# EAGLE board Counter With Two 7 Segment Display PCB (EAGLE 9.7.0)
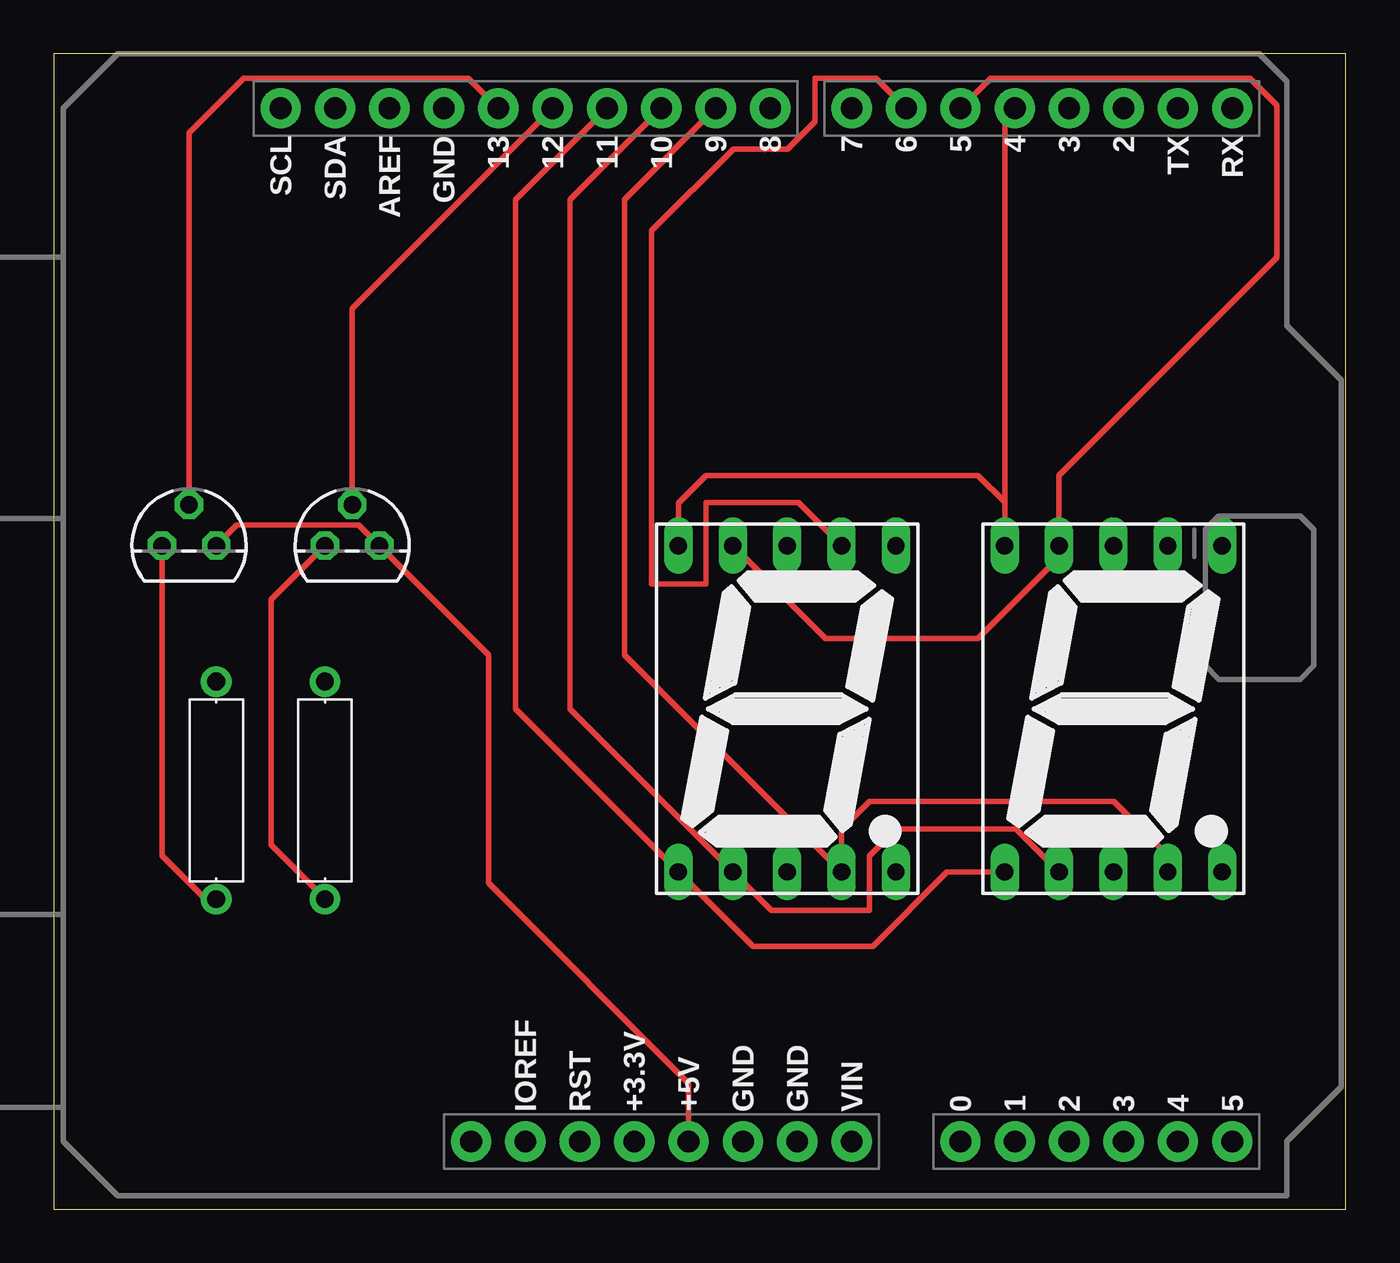
[diagram p0: board, top side]
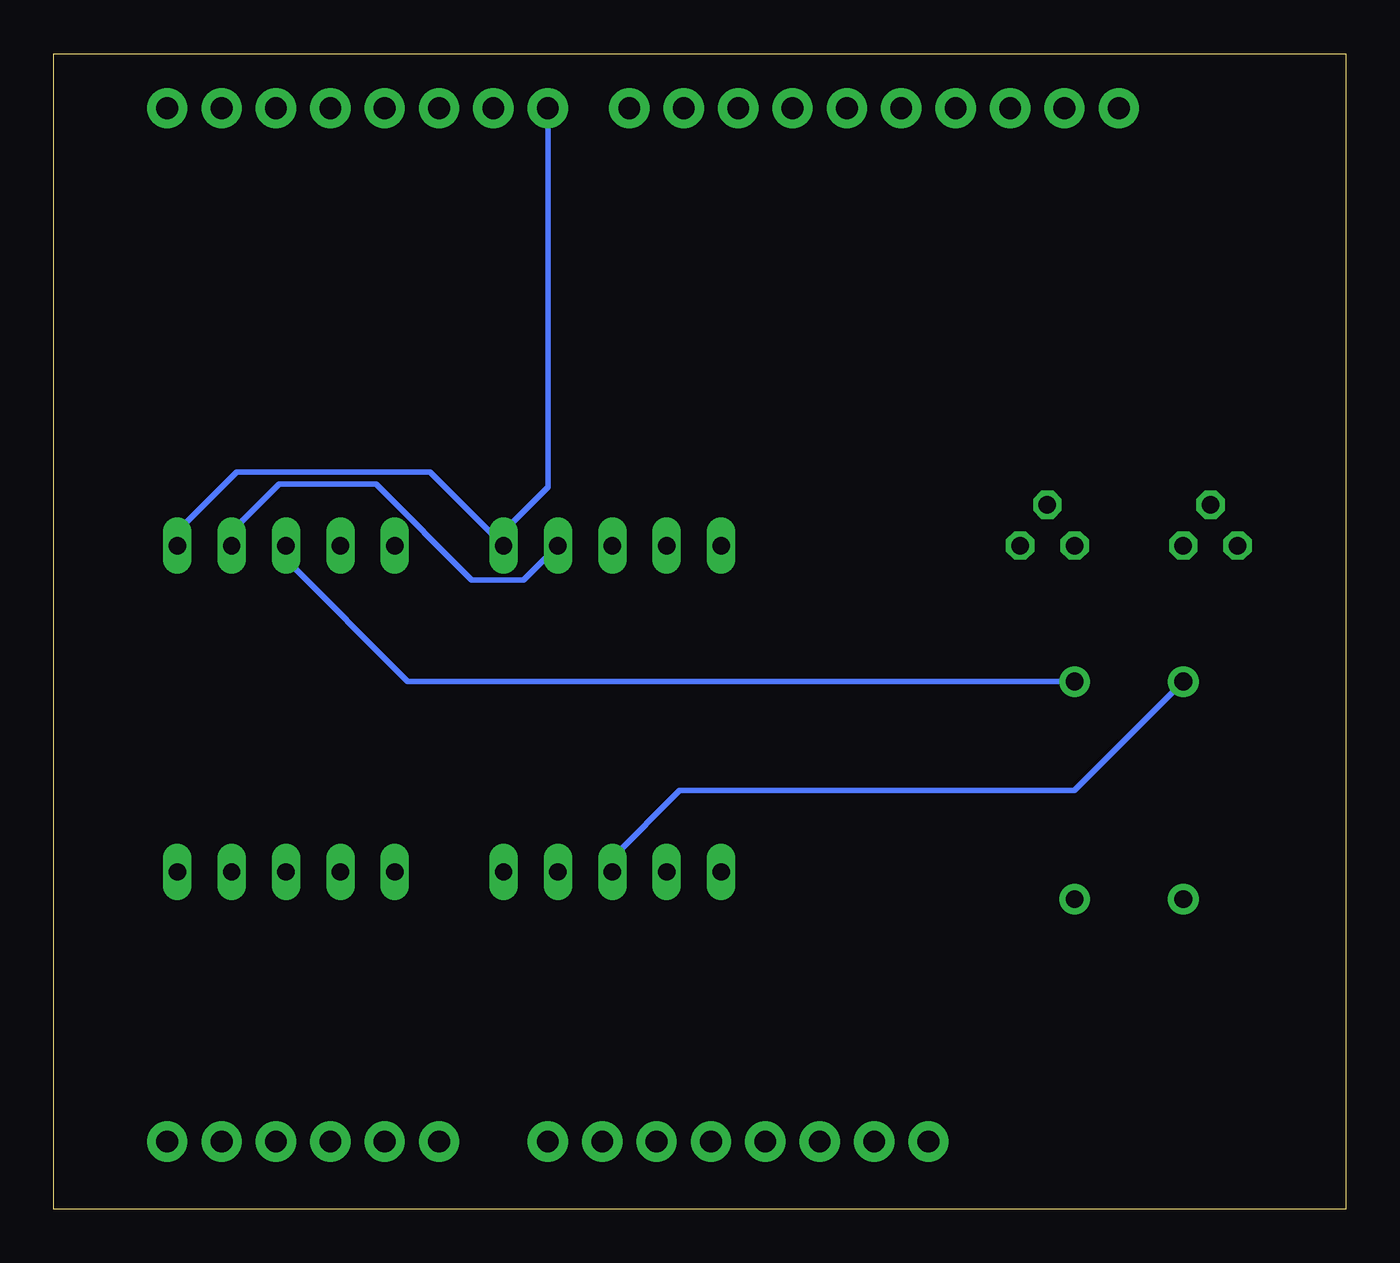
[diagram p1: board, bottom side, seen from below]

Size 60.37 x 53.99 mm. Coordinates in mm from the lower left corner, seen from the top.
Outline: 0,0 60.37,0 60.37,53.99 0,53.99 0,0
Copper layers (1*16): Top 0.035mm / dielectric 1.5mm / Bottom 0.035mm
Design rules "default": minimum track width 6mil, minimum drill 0.35mm, track to track 6mil, track to pad 6mil, pad to pad 6mil, via to via 6mil, smd to smd 6mil, copper to edge 40mil, drill to drill 6mil, minimum pad ring 10mil, minimum via ring 8mil, stop-mask expansion 4mil, vias tented up to drill 0mil, thermal gap 10mil

## Footprints (pad centres in the part's own frame; a part is rotated, then mirrored left to right if it is on the bottom)
7SEG-13 = drill 0.813 long: 1 -5.08,-7.62; 2 -2.54,-7.62; 3 0,-7.62; 4 2.54,-7.62; 5 5.08,-7.62; 6 5.08,7.62; 7 2.54,7.62; 8 0,7.62; 9 -2.54,7.62; 10 -5.08,7.62
RESAD1016W63L850D250B = drill 0.83 pad 1.43: 1 -5.08,0; 2 5.08,0
TO92 = drill 0.813 octagon: 1 -1.27,0; 2 0,1.905; 3 1.27,0
ARDUINO-UNO-R3-SHIELD = drill 1.016 pad 1.88: 3.3V 24.13,-2.54; 5V 24.13,0; A0 24.13,12.7; A1 24.13,15.24; A2 24.13,17.78; A3 24.13,20.32; A4 24.13,22.86; A5 24.13,25.4; AREF -24.13,-13.97; D2 -24.13,20.32; D3 -24.13,17.78; D4 -24.13,15.24; D5 -24.13,12.7; D6 -24.13,10.16; D7 -24.13,7.62; D8 -24.13,3.81; D9 -24.13,1.27; D10 -24.13,-1.27; D11 -24.13,-3.81; D12 -24.13,-6.35; D13 -24.13,-8.89; GND@0 24.13,2.54; GND@1 24.13,5.08; GND@2 -24.13,-11.43; IOREF 24.13,-7.62; NC 24.13,-10.16; RES 24.13,-5.08; RX -24.13,25.4; SCL -24.13,-19.05; SDA -24.13,-16.51; TX -24.13,22.86; VIN 24.13,7.62

## Placement (x,y rotation side)
DIGIT1  7SEG-CA  [7SEG-13]  34.27,23.39 0 top
DIGIT2  7SEG-CA  [7SEG-13]  49.51,23.39 0 top
R1  1k  [RESAD1016W63L850D250B]  7.6,19.58 90 top
R2  1k  [RESAD1016W63L850D250B]  12.68,19.58 90 top
T1  PNP  [TO92]  6.33,31.01 0 top
T2  PNP  [TO92]  13.95,31.01 0 top
U1  ARDUINO-UNO-R3-SHIELD  [ARDUINO-UNO-R3-SHIELD]  29.66,27.3 270 top

## Library data of the parts
DIGIT1 DIGIT2 = Tinkercad; CATEGORY: Opto-Electronic; SUB-CATEGORY: Display; TYPE: 7-Segment
R1 R2 U1 = Tinkercad
T1 T2 = Tinkercad; CATEGORY: Transistor; SUB-CATEGORY: BJT; TYPE: PNP

## Nets
DIGIT1_CA1: DIGIT1.3 R1.2
DIGIT2_CA2: DIGIT2.8 R2.2
T1_E: R1.1 T1.1
T2_E: R2.1 T2.1
U1_5V: T1.3 T2.3 U1.5V
U1_D4: DIGIT1.10 DIGIT2.10 U1.D4
U1_D5: DIGIT1.9 DIGIT2.9 U1.D5
U1_D6: DIGIT1.7 DIGIT2.7 U1.D6
U1_D7: DIGIT1.6 DIGIT2.6 U1.D7
U1_D9: DIGIT1.4 DIGIT2.4 U1.D9
U1_D10: DIGIT1.2 DIGIT2.2 U1.D10
U1_D11: DIGIT1.1 DIGIT2.1 U1.D11
U1_D12: T2.2 U1.D12
U1_D13: T1.2 U1.D13

## Tracks (layer width: path | path; a pad name or v marks a point on that pad's centre or on a via)
DIGIT1_CA1
  Bottom 0.254: DIGIT1.3 34.27,16.43 31.12,19.58 12.68,19.58 R1.2
DIGIT2_CA2
  Bottom 0.254: DIGIT2.8 49.51,30.35 43.82,24.66 R2.2
T1_E
  Top 0.254: T1.1 5.08,30.99 5.08,16.51 7.09,14.5 R1.1
T2_E
  Top 0.254: T2.1 10.16,28.49 10.16,17.02 R2.1
U1_5V
  Top 0.254: T1.3 8.57,31.97 14.26,31.97 T2.3 20.32,25.91 20.32,15.24 29.66,5.9 U1.5V
U1_D4
  Top 0.254: DIGIT1.10 29.19,33 30.48,34.29 43.18,34.29 44.43,33.04 DIGIT2.10 44.43,50.96 U1.D4
U1_D5
  Top 0.254: DIGIT1.9 36.07,26.67 43.18,26.67 46.97,30.46 DIGIT2.9 46.97,34.27 57.15,44.45 57.15,51.58 55.88,52.85 43.78,52.85 U1.D5
U1_D6
  Top 0.254: DIGIT1.7 34.8,33.02 30.48,33.02 30.48,29.21 27.94,29.21 27.94,45.72 31.75,49.53 34.29,49.53 35.56,50.8 35.56,52.85 38.41,52.85 U1.D6
  Bottom 0.254: DIGIT2.7 52.05,31.67 49.84,33.88 45.31,33.88 40.84,29.41 38.41,29.41 DIGIT1.7
U1_D7
  Bottom 0.254: U1.D7 37.28,33.73 39.35,31.67 DIGIT1.6 42.78,34.44 51.82,34.44 54.59,31.67 DIGIT2.6
U1_D9
  Top 0.254: U1.D9 26.67,47.17 26.67,25.91 DIGIT1.4 36.81,17.76 38.1,19.05 49.53,19.05 52.05,16.53 DIGIT2.4
U1_D10
  Top 0.254: U1.D10 24.13,47.17 24.13,23.37 DIGIT1.2 33.53,13.97 38.1,13.97 38.1,16.51 39.37,17.78 44.96,17.78 DIGIT2.2
U1_D11
  Top 0.254: U1.D11 21.59,47.17 21.59,23.37 DIGIT1.1 32.66,12.29 38.27,12.29 41.74,15.77 DIGIT2.1
U1_D12
  Top 0.254: T2.2 13.95,42.07 U1.D12
U1_D13
  Top 0.254: T1.2 6.33,50.29 8.89,52.85 19.36,52.85 U1.D13